# Altium PCB PCB.PcbDoc
Units mil, origin at the board's own origin, x right, y up, seen from the top; angles counter-clockwise.
Board outline 6000 x 4000 mil, 2 copper layers (Top Layer, Bottom Layer); 53 components, 40 nets, 177 pads, 0 vias.
Unrouted connection lines stored in the file: 111.
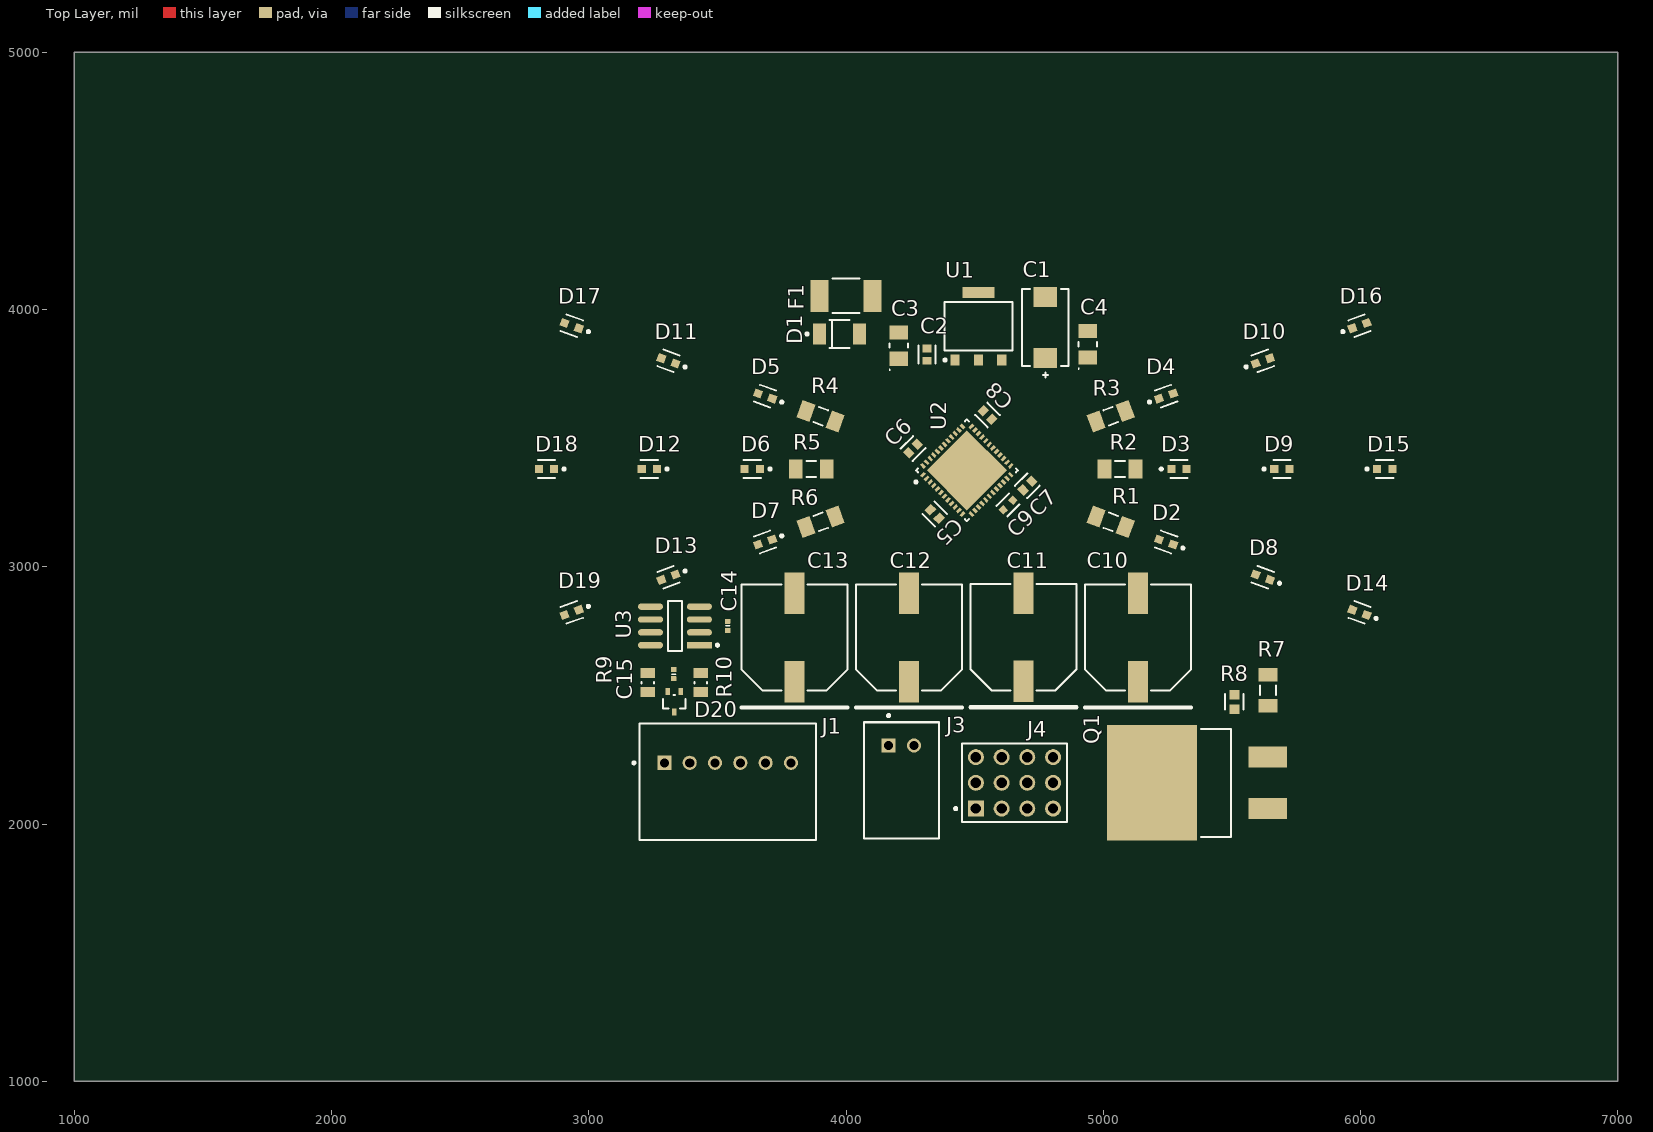
[diagram p0: Top Layer view]
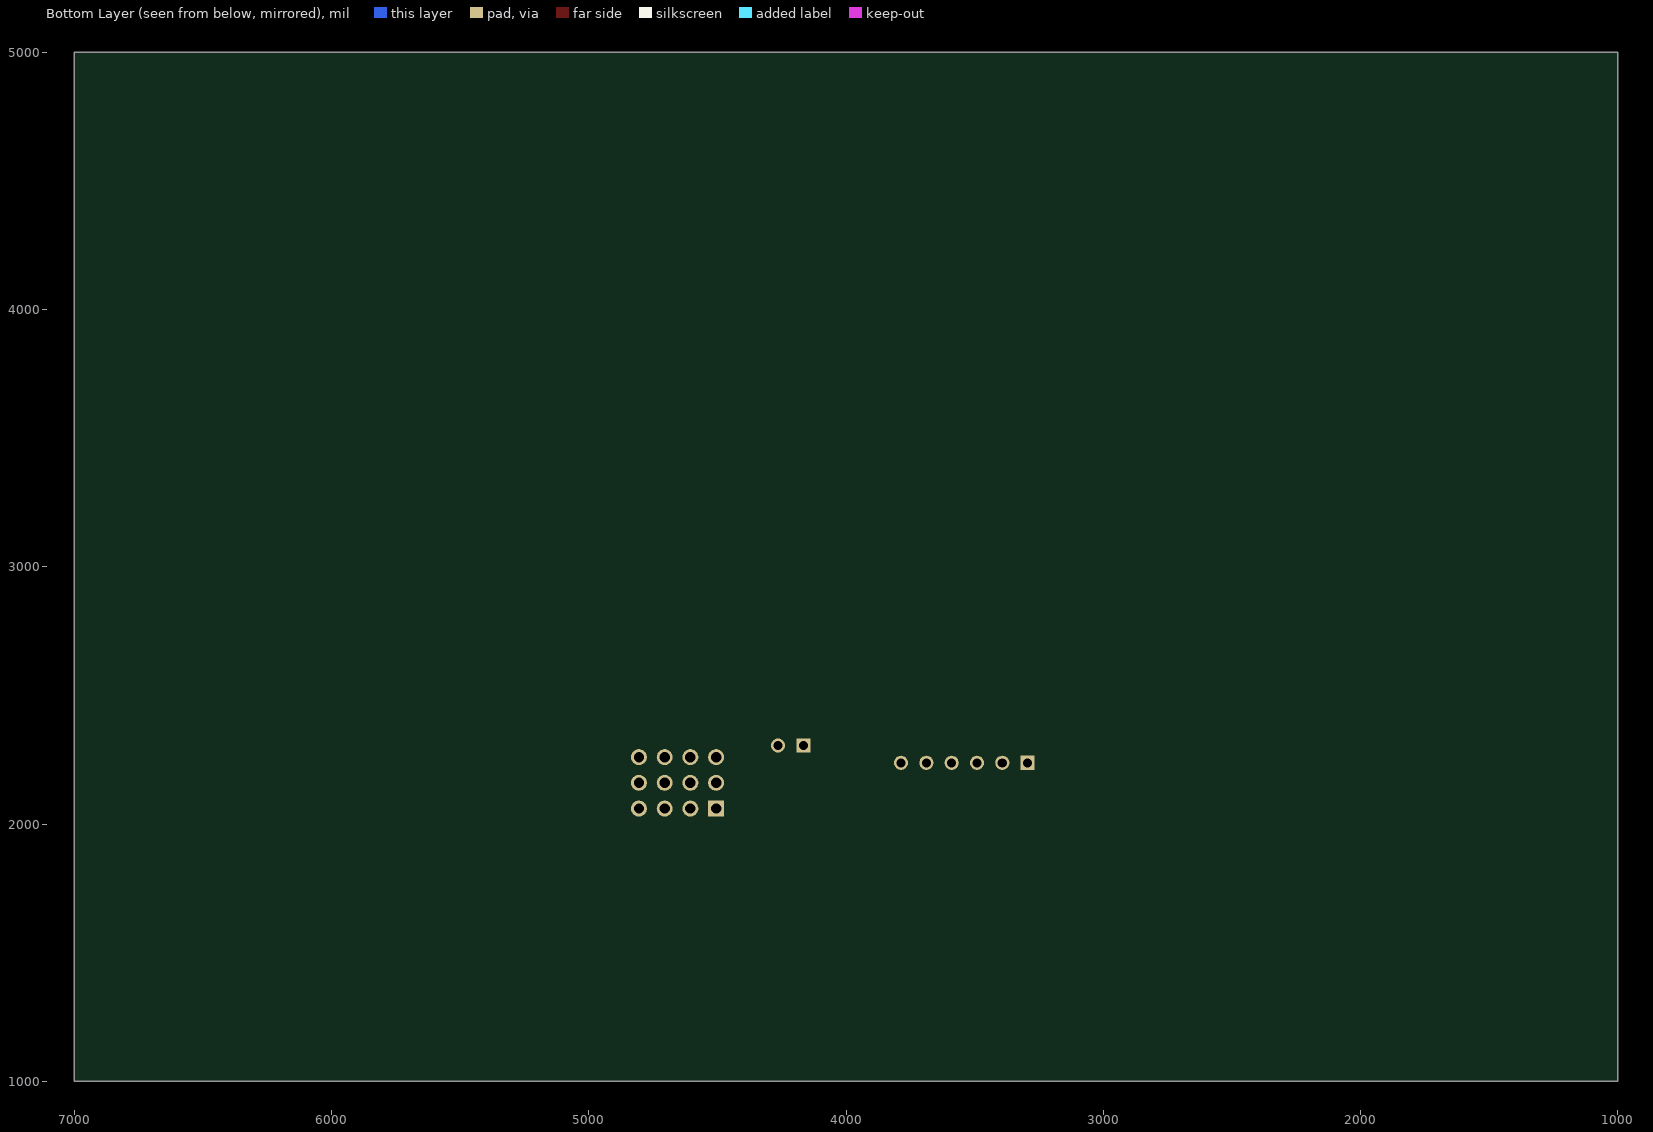
[diagram p1: Bottom Layer view, seen from below]

## Layer stack, top to bottom
Top Solder: solder mask 0.4, Solder Resist, Dk 3.5
Top Layer: signal copper 1.4
Dielectric 1: dielectric 12.6, FR-4, Dk 4.8
Bottom Layer: signal copper 1.4
Bottom Solder: solder mask 0.4, Solder Resist, Dk 3.5

## Board outline
1000,1000 7000,1000 7000,5000 1000,5000

## Design rules (kind name [scope] priority, off if disabled: settings)
Clearance [All] p1: gap=10 ignorepadtopadclearanceinfootprint=TRUE except(0: Arc-Hole Track-Hole SMDPad-Hole THPad-Hole Via-Hole Fill-Hole Poly-Hole Region-Hole Text-Hole)
PolygonConnect [All] p1: connectstyle=Relief reliefconductorwidth=10 reliefentries=4 polygonreliefangle="90 Angle" airgapwidth=10
RoutingVias [All] p1: holewidth=10 width=20 viastyle="Through Hole" minholewidth=10 minwidth=20 maxholewidth=28 maxwidth=50
SolderMaskExpansion [All] p1: expansion=4 istentingtop=FALSE
Width [All] p1: maxlimit=50 minlimit=8 preferedwidth=8
30 further rules are at their usual default settings.

## Classes and differential pairs
component class "Voltage Regulators": C1 C2 C3 C4 U1
component class STM32: C5 C6 C7 C8 C9 C10 C11 C12 C13 J4 U2
component class LEDs: D2 D3 D4 D5 D6 D7 D8 D9 D10 D11 D12 D13 D14 D15 D16 D17 D18 D19 Q1 R1 R2 R3 R4 R5 R6 R7 R8
component class "CAN Transceiver": C14 C15 D20 R9 R10 U3
component class Brakelight: D1 F1 J1 J2 J3

## Components (designator, comment, footprint, x,y, rotation, side; value= is the part's Value field where it differs from the comment)
C1 "100µF" FP-T491X107K025AT-MFG 4775,3930 r270 top
C2 "0.1u" FP-C0603C-CF-MFG 4315,3825 r90 top value="0.10 μF"
C3 "TAJA106K016RNJ" CAPMP3217X18-T_V 4205,3860 r90 top value=10µF
C4 "TAJA106K016RNJ" CAPMP3217X18-T_V 4940,3865 r90 top value=10µF
C5 "0.1u" FP-C0603C-CF-MFG 4345,3205 r135 top value="0.10 μF"
C6 "0.1u" FP-C0603C-CF-MFG 4260,3460 r45 top value="0.10 μF"
C7 "0.1u" FP-C0603C-CF-MFG 4705,3315 r225 top value="0.10 μF"
C8 "0.1u" FP-C0603C-CF-MFG 4550,3590 r315 top value="0.10 μF"
C9 "2.2uF" FP-GRM188-0_1-e0_2_0_5-MFG 4630,3240 r45 top
C10 "470u" PNSC-FP-V-G_V 5135.15,2725 r90 top
C11 "470u" PNSC-FP-V-G_V 4690.1,2725.54 r90 top
C12 "470u" PNSC-FP-V-G_V 4245.05,2725 r90 top
C13 "470u" PNSC-FP-V-G_V 3800,2725 r90 top
C14 "100nF" CAPC0402(1005)60_L 3540,2770 r270 top
C15 "100nF" CAPC0402(1005)60_L 3330,2582.74 r90 top
D1 "SMAJ15A" FP-SMA-MFG 3975,3905 r0 top
D2 "LTST-C190EKT" FP-LTST-C190EKT-MFG 5244.5,3096.28 r160 top
D3 "LTST-C190EKT" FP-LTST-C190EKT-MFG 5294.53,3380 r0 top
D4 "LTST-C190EKT" FP-LTST-C190EKT-MFG 5244.5,3663.72 r20 top
D5 "LTST-C190EKT" FP-LTST-C190EKT-MFG 3685.5,3663.72 r160 top
D6 "LTST-C190EKT" FP-LTST-C190EKT-MFG 3635.47,3380 r180 top
D7 "LTST-C190EKT" FP-LTST-C190EKT-MFG 3685.5,3096.28 r200 top
D8 "LTST-C190EKT" FP-LTST-C190EKT-MFG 5620.38,2959.48 r160 top
D9 "LTST-C190EKT" FP-LTST-C190EKT-MFG 5694.53,3380 r0 top
D10 "LTST-C190EKT" FP-LTST-C190EKT-MFG 5620.38,3800.52 r20 top
D11 "LTST-C190EKT" FP-LTST-C190EKT-MFG 3309.62,3800.52 r160 top
D12 "LTST-C190EKT" FP-LTST-C190EKT-MFG 3235.47,3380 r180 top
D13 "LTST-C190EKT" FP-LTST-C190EKT-MFG 3309.62,2959.48 r200 top
D14 "LTST-C190EKT" FP-LTST-C190EKT-MFG 5996.26,2822.67 r160 top
D15 "LTST-C190EKT" FP-LTST-C190EKT-MFG 6094.53,3380 r0 top
D16 "LTST-C190EKT" FP-LTST-C190EKT-MFG 5996.26,3937.33 r20 top
D17 "LTST-C190EKT" FP-LTST-C190EKT-MFG 2933.74,3937.33 r160 top
D18 "LTST-C190EKT" FP-LTST-C190EKT-MFG 2835.47,3380 r180 top
D19 "LTST-C190EKT" FP-LTST-C190EKT-MFG 2933.74,2822.67 r200 top
D20 "ESDCAN02-2BWY" FP-SOT323-3L-MFG 3332.31,2475.29 r270 top value=3pF
F1 "1812L150/24MR" FP-1812L-MFG 4000,4052.81 r180 top value=0.04-0.12Ω
J1 "S6B-XH-A-1(LF)(SN)" FP-S6B-XH-A-1_LF_SN-MFG 3540,2165 r180 top
J3 "S2B-XH-A(LF)(SN)" JST-S2B-XH-A(LF)(SN)_V 4215,2305 r0 top
J4 "TSW-104-07-G-T" FP-TSW-104-07-G-T-MFG 4655,2160 r0 top
Q1 "IRLZ44N" FP-PG-TO263-3-MFG 5365,2160 r90 top
R1 "300" FP-CRCW1206-e3-IPC_A 5028.82,3174.79 r159.99 top
R2 "300" FP-CRCW1206-e3-IPC_A 5065,3380 r180 top
R3 "300" FP-CRCW1206-e3-IPC_A 5028.82,3585.21 r200 top
R4 "300" FP-CRCW1206-e3-IPC_A 3901.18,3585.21 r340 top
R5 "300" FP-CRCW1206-e3-IPC_A 3865,3380 r0 top
R6 "300" FP-CRCW1206-e3-IPC_A 3901.18,3174.79 r20 top
R7 "300" FP-CRCW1206-e3-IPC_A 5640,2520 r270 top
R8 "10K" FP-CRCW0603-e3-IPC_B 5510,2475 r270 top
R9 "59" FP-CRCW0805-e3-IPC_B 3229.62,2550 r270 top
R10 "59" FP-CRCW0805-e3-IPC_B 3435,2550 r90 top
U1 "LT1129IST-3.3#PBF" LT-ST-3-SOT-223_L 4515,3935 r90 top
U2 "STM32F412CGU6" FP-UFQFPN48-A0B9-MFG 4470,3375 r45 top
U3 "SN65HVD230DR" FP-D0008A-IPC_A 3335,2770 r180 top

## Footprints (in the part's own frame and the unit in brackets; to place one, negate y for a bottom-side part, rotate by r counter-clockwise, add the part's x,y. Pads: shape width x height; smd on the part's side, far side on the other; paste and mask are expansions set on the pad)
CAPC0402(1005)60_L [mm] "Chip Capacitor, Body 1.0x0.5mm, Height 0.6mm, IPC High Density"
  rrect25% 0.5x0.55 smd: 1(-0.45,0) 2(0.45,0)
  silkscreen extent 0,-0.2 0,0.2, body extent -0.5,-0.25 0.5,0.25, height 0.6
CAPMP3217X18-T_V [mm] "Molded Capacitor, 2-Leads, Body 3.40x1.8mm"
  rect 1.4x1.8 smd: 1(-1.3,0) 2(1.3,0)
  silkscreen extent -2.45,-0.9 0.2,0.95, body extent -1.92,-0.9 1.92,0.9, height 1.8
FP-1812L-MFG [mm]
  rect 1.78x3.15 smd paste+0 mask+0: 1(-2.615,0) 2(2.615,0)
  silkscreen extent -1.35,-1.71 1.35,1.71, body extent -3.6,-1.81 3.6,1.81, height 0.25
FP-C0603C-CF-MFG [mm]
  rect 0.75x0.9 smd paste+0 mask+0: 1(-0.6,0) 2(0.6,0)
  silkscreen extent -0.87,-0.85 0.88,0.85, body extent -1.2,-0.6 1.2,0.6, height 0.25
FP-CRCW0603-e3-IPC_B [mil]
  rect 36.81x37.88 smd paste+0 mask+0: 1(-28.17,0) 2(28.17,0)
  silkscreen extent -30,-37 30,35, body extent -56,-29 56,29, height 10
FP-CRCW0805-e3-IPC_B [mil]
  rect 39.63x55.44 smd paste+0 mask+0: 1(-37.44,0) 2(37.44,0)
  silkscreen extent -3,-25 3,25, body extent -39,-25 39,25, height 20
FP-CRCW1206-e3-IPC_A [mil]
  rect 53.39x73.16 smd paste+0 mask+0: 1(-60.08,0) 2(60.08,0)
  silkscreen extent -19,-31 19,31, body extent -106,-56 106,56, height 10
FP-D0008A-IPC_A [mil]
  rect 97.21x24.49 smd paste+0 mask+0: 1(-95.02,75)
  rrect100% 97.21x24.49 smd paste+0 mask+0: 2(-95.02,25) 3(-95.02,-25) 4(-95.02,-75) 5(95.02,-75) 6(95.02,-25) 7(95.02,25) 8(95.02,75)
  silkscreen extent -170,-97 27,97, body extent -163,-116 163,116, height 10
FP-GRM188-0_1-e0_2_0_5-MFG [mm]
  rect 0.65x0.7 smd paste+0 mask+0: 1(-0.675,0) 2(0.675,0)
  silkscreen extent -0.85,-0.75 0.85,0.75, body extent -1.1,-0.55 1.1,0.55, height 0.25
FP-LTST-C190EKT-MFG [mm]
  rect 0.8x0.8 smd paste+0 mask+0: 1(-0.75,0) 2(0.75,0)
  silkscreen extent -1.87,-0.87 0.85,0.88, body extent -1.25,-0.55 1.25,0.55, height 0.25
FP-PG-TO263-3-MFG [mm]
  rect 2.08x3.81 smd paste+0 mask+0: 1(-2.54,-6.985) 3(2.54,-6.985)
  rect 11.43x8.89 smd paste+0 mask+0: 4(0,4.445)
  silkscreen extent -5.34,-3.36 5.34,-0.38, body extent -5.81,-8.99 5.81,8.99, height 0.25
FP-S6B-XH-A-1_LF_SN-MFG [mm]
  rect 1.4x1.4 hole 0.9 paste-1000 mask+0: 1(6.25,-1.85)
  round 1.4 hole 0.9 paste-1000 mask+0: 2(3.75,-1.85) 3(1.25,-1.85) 4(-1.25,-1.85) 5(-3.75,-1.85) 6(-6.25,-1.85)
  silkscreen extent -8.7,-5.75 9.37,5.75, body extent -8.8,-5.85 8.8,5.85, height 0.25
FP-SMA-MFG [mm]
  rect 1.27x2.1 smd paste+0 mask+0: 1(-1.985,0) 2(1.985,0)
  silkscreen extent -3.32,-1.4 0.97,1.4, body extent -2.72,-1.5 2.72,1.5, height 0.25
FP-SOT323-3L-MFG [mm]
  rect 0.7x0.42 smd paste+0 mask+0: 1(-1,0.65) 2(-1,-0.65) 3(1,0)
  silkscreen extent -0.67,-1.1 0.67,1.1, body extent -1.45,-1.2 1.45,1.2, height 0.25
FP-T491X107K025AT-MFG [mm]
  rect 1.99x2.33 smd paste+0 mask+0: 1(-3.01,0) 2(3.01,0)
  silkscreen extent -3.8,-2.3 4.92,2.3, body extent -4.11,-2.4 4.11,2.4, height 0.25
FP-TSW-104-07-G-T-MFG [mm]
  rect 1.57x1.57 hole 1.02 paste-1000 mask+0: 1(-3.81,-2.54)
  round 1.57 hole 1.02 paste-1000 mask+0: 2(-3.81,0) 3(-3.81,2.54) 4(-1.27,-2.54) 5(-1.27,0) 6(-1.27,2.54) 7(1.27,-2.54) 8(1.27,0) 9(1.27,2.54) 10(3.81,-2.54) 11(3.81,0) 12(3.81,2.54)
  silkscreen extent -5.93,-3.88 5.21,3.88, body extent -5.31,-3.98 5.31,3.98, height 0.25
FP-UFQFPN48-A0B9-MFG [mm]
  rect 0.55x0.3 smd paste+0 mask+0: 1(-3.375,2.75) 2(-3.375,2.25) 3(-3.375,1.75) 4(-3.375,1.25) 5(-3.375,0.75) 6(-3.375,0.25) 7(-3.375,-0.25) 8(-3.375,-0.75) 9(-3.375,-1.25) 10(-3.375,-1.75) 11(-3.375,-2.25) 12(-3.375,-2.75) 25(3.375,-2.75) 26(3.375,-2.25) 27(3.375,-1.75) 28(3.375,-1.25) 29(3.375,-0.75) 30(3.375,-0.25) 31(3.375,0.25) 32(3.375,0.75) 33(3.375,1.25) 34(3.375,1.75) 35(3.375,2.25) 36(3.375,2.75)
  rect 0.3x0.55 smd paste+0 mask+0: 13(-2.75,-3.375) 14(-2.25,-3.375) 15(-1.75,-3.375) 16(-1.25,-3.375) 17(-0.75,-3.375) 18(-0.25,-3.375) 19(0.25,-3.375) 20(0.75,-3.375) 21(1.25,-3.375) 22(1.75,-3.375) 23(2.25,-3.375) 24(2.75,-3.375) 37(2.75,3.375) 38(2.25,3.375) 39(1.75,3.375) 40(1.25,3.375) 41(0.75,3.375) 42(0.25,3.375) 43(-0.25,3.375) 44(-0.75,3.375) 45(-1.25,3.375) 46(-1.75,3.375) 47(-2.25,3.375) 48(-2.75,3.375)
  rect 5.6x5.6 smd paste+0 mask+0: 49(0,0)
  silkscreen extent -4.5,-3.55 3.55,3.55, body extent -3.75,-3.75 3.75,3.75, height 0.25
JST-S2B-XH-A(LF)(SN)_V [mm] "Header, 2-Leads, Body 7.4x11.5mm, Pitch 2.5mm"
  rect 1.4x1.4 hole 0.9: 1(-1.25,0)
  round 1.4 hole 0.9: 2(1.25,0)
  silkscreen extent -3.7,-9.2 3.7,3.08, body extent -3.7,-9.2 3.7,2.3, height 6.1
LT-ST-3-SOT-223_L [mm] "SOT223, 4-Leads, Body 6.505x3.505mm, Pitch 2.3mm, IPC High Density"
  rect 1.1x0.9 smd: 1(-3.35,2.3) 2(-3.35,0) 3(-3.35,-2.3)
  rect 1.1x3.15 smd: 4(3.35,0)
  silkscreen extent -3.47,-3.35 2.4,3.42, body extent -1.86,-3.35 1.86,3.35, height 1.8
PNSC-FP-V-G_V [mm] "CAPAE, 2-Leads, Body 10.50x10.50mm"
  rect 4.1x2 smd: 1(-4.35,0) 2(4.35,0)
  silkscreen extent -6.9,-5.25 5.25,5.25, body extent -6,-5.25 6,5.25, height 10.5

## Part data
C1: library part CMP-2000-07204-2, "CAP TANT 100UF 10% 25V 2917", Capacitance=100uF, Case Code (Imperial)=2917, Case Code (Metric)=7343, Dielectric Material=Tantalum, ESR (Equivalent Series Resistance)=300mR, Leakage Current=25uA, Max Operating Temperature=125°C, Min Operating Temperature=-55°C, Package Quantity=1, Ripple Current=742mA, Tolerance=10%, Voltage=25V, Case/Package=2917, Construction=Flat, Depth=4.3mm, Dissipation Factor=8%, Failure Rate=0.001%, Features="General Purpose", Height=4mm, Height - Seated (Max)=0.169inch, Lead Free="Lead Free", Length=7.3mm, Life (Hours)=2000Hour, Mount="Surface Mount", Number of Pins=2, Packaging="Tape and Reel", Polarity=Polar, Radiation Hardening=No, REACH SVHC="No SVHC", RoHS Compliant=No, Series=T491, Termination=SMD/SMT, Voltage Rating=25V, Voltage Rating (DC)=25V, Width=4.3mm
C2 C5 C6 C7 C8: library part CMP-2006-03061-2, "CAP CER 0.1UF 50V X7R 0603", Capacitance="0.10 μF", Manufacturer=KEMET, Manufacturer Part Number=C0603C104K5RACTU, Package=C0603C-CF, Temperature="-55°C to +125°C", Temperature Characteristic=X7R, Temperature Coefficient=30ppm/°C, Temperature Range High=+125°C, Temperature Range Low=-55°C, Tolerance=0.1, Voltage Rating="50 V", Automotive=Yes, Automotive Grade="Grade 1", Category=Cap, ComponentLink2Description=Datasheet, ComponentLink2URL=https://api.kemet.com/component-edge/download/datasheet/C0603C100J5GACAUTO.pdf, Device Class L1="Passive Components", Device Class L2=Capacitors, Device Class L3="Ceramic Capacitors", Digikey Description="CAP CER 0.1UF 50V X7R 0603", Height=0.87mm, Lead Free=Yes, Material=Ceramic, Octopart=https://octopart.com/c0603c104k5ractu-kemet-139244, RoHS=TRUE
C3 C4: library part CMP-001-00041-6, "Standard Tantalum, 10 uF, +/- 10%, 16 V, -55 to 125 degC, 1206 (3216 Metric), RoHS, Tape and Reel", Capacitor Type=Tantalum, Case/Package=1206, Manufacturer=AVX, Max Operating Temperature=125°C, Min Operating Temperature=-55°C, Package Description="2-Pin Surface Mount Device, Body 3.2 x 1.65 mm", Package Quantity=1, Package Reference=CAPMP3217X18-T, Tolerance=10%, Voltage Rating=16V, Datasheet URL=http://datasheets.avx.com/TAJ.pdf, Datasheet Version=Feb-16, ESR=3Ohm, Manufacturer URL=http://www.avx.com/, Mounting Technology=SM, Package URL=http://www.avx.com/download/software/literature/AVX-Footprint-Library.pdf, Packaging=TapeandReel, Pins=2, RoHS Compliant=True
C9: library part CMP-2006-02836-2, "Chip Multilayer Ceramic Capacitors for General Purpose, 0603, 2.2uF, X7R, 15%, 10%, 10V", Case Code (Imperial)=0603, Case Code (Metric)=1608, Dielectric=X7R, Max Operating Temperature=125°C, Min Operating Temperature=-55°C, Package Quantity=1, Tolerance=10%, Voltage=10V, Capacitance=2.2uF, Case/Package=0603, Depth=0.8mm, Height=0.8mm, Lead Free="Lead Free", Length=1.6mm, Material=Ceramic, Mount="Surface Mount", Number of Pins=2, Packaging="Cut Tape", REACH SVHC="No SVHC", Termination=SMD/SMT, Thickness=0.035inch, Voltage Rating=10V, Voltage Rating (DC)=10V, Weight=7.1E-05oz, Width=0.031inch
C10 C11 C12 C13: library part CMP-2000-06214-1, "Aluminum Electrolytic Capacitor, 470 uF, +/- 20%, 25 V, 2-Pin SMD (Size Code G), -55 to 105 degC, RoHS, Tape and Reel", Capacitance=470µF, Case Size/Dimension=Ø10x10.2mm, ESR (Equivalent Series Resistance)=0.06O, Lifetime@Temperature=2000Hrs@105°C, Manufacturer=Panasonic, Operating Temp Range=-55to+105°C, Operating Temp-Max=105°C, Package Description="2-Pin Electrolytic Aluminum Capacitor, Body 10.3 x 10.3 mm", Package Reference=FP-V-G, Rated Voltage=25V, Ripple Current=1190mA, Datasheet URL=http://industrial.panasonic.com/cdbs/www-data/pdf/RDE0000/ABA0000C1184.pdf, Datasheet Version=03/2016, Manufacturer URL=http://www.panasonic.com/, Mounting Technology=SurfaceMount, Package URL=http://industrial.panasonic.com/cdbs/www-data/pdf/RDE0000/DME0000COL48.pdf, Series=FP, Type=Can
C14 C15: library part CMP-001-00061-2, "Chip Capacitor, 100nF +/-20%, 10V, 0402, Thickness 0.6 mm", Case/Package=0402, Max Operating Temperature=85°C, Min Operating Temperature=-55°C, Tolerance=20%, Voltage Rating=10V, Mounting Technology=SMT, Pins=2
D1: library part CMP-07401-000026-1, "TVS DIODE 15V 24.4V SMA", Breakdown Voltage=16.7V, Clamping Voltage=24.4V, Manufacturer="Bourns Inc.", Max Junction Temp=+150°C, Package=SMA, Peak Pulse Current=16.4A, Peak Pulse Power=400W, Reverse Standoff Voltage=15V, Temperature="-55°C to +150°C", Temperature Range Low=-55°C, Automotive=No, Category=Diode, ComponentLink2Description=Datasheet, ComponentLink2URL=https://www.bourns.com/docs/Product-Datasheets/SMAJ.pdf, Device Class L1="Circuit Protection", Device Class L2="TVS Diodes", Device Class L3=unset, Digikey Description="TVS DIODE 15V 24.4V SMA", Direction=Unidirectional, Height=2.29mm, Lead Free=Yes, Manufacturer Part Number=SMAJ15A, Mouser Description="Bourns Smaj15a / Diode Tvs 15v 400w Uni 5% Smd Bourns", Number Of Channels=1, Octopart=https://octopart.com/smaj15a-bourns-12809353, RoHS=TRUE, Temperature Range High=+150°C
D2 D3 D4 D5 D6 D7 D8 D9 D10 D11 D12 D13 D14 D15 D16 D17 D18 D19: library part CMP-22017-000021-1, "LED RED CLEAR CHIP SMD", Case Code (Imperial)=0603, Case Code (Metric)=1608, Color=Red, Forward Current=30mA, Forward Voltage=2V, Lens Color=Colorless, Max Operating Temperature=85°C, Max Power Dissipation=100mW, Min Operating Temperature=-55°C, Package Quantity=1, Reverse Voltage=5V, Test Current=10mA, Case/Package=0603, Depth=0.8mm, Dominant Wavelength=621nm, Height=0.8mm, Illumination Color=Red, Lead Free="Lead Free", Length=1.6mm, Lens Style=Clear, Lens Transparency=Clear, Luminous Intensity=2mcd, Mount="Surface Mount", Number of Elements=1, Number of LEDs=1, Number of Pins=2, Packaging="Tape and Reel", Power Dissipation=100mW, Power Rating=100mW, Radiation Hardening=No, Viewing Angle=130°, Wavelength=630nm, Width=0.8mm
D20: library part CMP-12225-000055-1, "TVS DIODE 26.5V 44V SOT323-3", Breakdown Voltage=28.5V, Capacitance=3pF, Clamping Voltage=44V, Manufacturer=STMicroelectronics, Max Junction Temp=+175°C, Package=SOT323-3L, Peak Pulse Current=3A, Peak Pulse Power=170W, Reverse Standoff Voltage=26.5V, Temperature="-55°C to +175°C", Temperature Range Low=-55°C, Automotive=Yes, Automotive Grade="Grade 0", Category=Diode, ComponentLink2Description=Datasheet, ComponentLink2URL=https://www.st.com/resource/en/datasheet/esdcan02-2bwy.pdf, Device Class L1="Circuit Protection", Device Class L2="TVS Diodes", Device Class L3=unset, Digikey Description="TVS DIODE 26.5V 44V SOT323-3", Direction=Bidirectional, Height=1.1mm, Ipc Land Pattern Name=SOT65P210X95-3, Lead Free=Yes, Manufacturer Part Number=ESDCAN02-2BWY, Mouser Description="TVS Diodes / ESD Suppressors Automotive dual-line Transil, Transient voltage suppressor (TVS) for CAN bus", Number Of Channels=2, Octopart=https://octopart.com/esdcan02-2bwy-stmicroelectronics-58631133, RoHS=TRUE, Standoff Height=0mm, Temperature Range High=+175°C
F1: library part CMP-08606-000018-1, "PTC RESET FUSE 24V 1.5A 1812", Ambient Temperature Range High=+85°C, Ambient Temperature Range Low=-40°C, Current Rating=20A, Hold Current=1.5A, Manufacturer="Littelfuse Inc", Package=1812L, Resistance=0.04-0.12Ω, Temperature="-40°C to +85°C", Trip Current=3A, Voltage Rating=24V, Automotive=No, Category=Fuse, ComponentLink2Description=Datasheet, ComponentLink2URL=https://www.littelfuse.com/~/media/electronics/datasheets/resettable_ptcs/littelfuse_ptc_1812l_datasheet.pdf.pdf, Device Class L1="Circuit Protection", Device Class L2="PTC Resettable Fuses", Device Class L3=unset, Digikey Description="PTC RESET FUSE 24V 1.5A 1812", Height=1.8mm, Ipc Land Pattern Name=CAPC455324X130, Lead Free=Yes, Manufacturer Part Number=1812L150/24MR, Mouser Description="Resettable Fuses - PPTC 24V 1.5A-HD 40A MAX", Octopart=https://octopart.com/1812l150%2F24mr-littelfuse-7130198, RoHS=TRUE, Temperature Range High=+85°C, Temperature Range Low=-40°C, Trip Time=1.5s
J1: library part CMP-17439-000023-1, "CONN HEADER R/A P6OS 2.5MM", Color=Natural, Current Rating=3A, Insulation Resistance=1GR, Max Operating Temperature=85°C, Min Operating Temperature=-25°C, Voltage Rating=250V, Contact Material=Brass, Contact Plating=Tin, Gender=Male, Lead Free="Lead Free", Material=Polyamide, Mount="Through Hole", Number of Positions=6, Number of Rows=1, Pitch=2.5mm, Termination=Crimp
J3: library part CMP-1755-00005-1, "Male Header, Pitch 2.5 mm, 1 x 2 Position, Height 6.1 mm, Tail Length 3.4 mm, -25 to 85 degC, RoHS, Bulk", Capacitance="1 nF", Case\Package=Radial, Max Operating Temperature="125 degC", Min Operating Temperature="-55 degC", Package Quantity=500, Tolerance=10%, Type (Capacitors)=X7R, Voltage Rating="100 V", ComponentLink1Description="Manufacturer URL", ComponentLink1URL=http://www.jst.com/home2.html, ComponentLink2Description=Datasheet, ComponentLink2URL=http://www.jst-mfg.com/product/pdf/eng/eXH.pdf, DatasheetVersion=May-16, Height="2.54 mm", Lead Pitch="2.54 mm", Length="5.33 mm", Mount="Through Hole", PackageDescription="Male Header, Pitch 2.5 mm, 1 x 2 Position, Height 6.1 mm, Tail Length 3.4 mm", PackageReference=S2B-XH-A(LF)(SN), Packaging=Bulk, Pins=2, Radiation Hardening=No, REACH SVHC="No SVHC", RoHSCompliant=true, Voltage Rating (DC)="100 V", Width="3.81 mm"
J4: library part CMP-1024-00347-2, "CONN HEADER VERT 12POS 2.54MM", Manufacturer=Samtec, Temperature="-55°C to +125°C", Temperature Range High=+125°C, Temperature Range Low=-55°C, Automotive=No, Category=Conn, ComponentLink2Description=Datasheet, ComponentLink2URL=http://suddendocs.samtec.com/prints/tsw-xxx-xx-xxx-x-xx-xxx-mkt.pdf, Conn Gender=Male, Conn Orientation=Straight, Contact Material=Gold,Nickel, Device Class L1=Connectors, Device Class L2="Headers and Wire Housings", Device Class L3=unset, Digikey Description="CONN HEADER VERT 12POS 2.54MM", Footprint Url=http://suddendocs.samtec.com/prints/tsw-xxx-xx-x-x-xx-xxx-footprint.pdf, Height=8.64mm, Lead Free=Yes, Manufacturer Part Number=TSW-104-07-G-T, Number Of Contacts=12, Number of Rows=3, Octopart=https://octopart.com/tsw-104-07-g-t-samtec-8296723, Package=TSW-104-07-G-T, Pitch=2.54mm, RoHS=TRUE
Q1: library part CMP-32901-000495-1, "MOSFET N-CH 55V 47A D2PAK", Case/Package=D2PAK, Continuous Drain Current (ID)=47A, Drain to Source Breakdown Voltage=55V, Drain to Source Resistance=35mR, Gate to Source Voltage (Vgs)=16V, Input Capacitance=1.7nF, Max Operating Temperature=175°C, Max Power Dissipation=3.8W, Min Operating Temperature=-55°C, Power Dissipation=110W, Threshold Voltage=2V, Drain to Source Voltage (Vdss)=55V, Element Configuration=Single, Halogen Free="Halogen Free", Height=0.19inch, Lead Free="Contains Lead", Length=0.42inch, Max Dual Supply Voltage=55V, Mount="Surface Mount", Number of Pins=3, Packaging="Tape and Reel", Rds On Max=22mR, REACH SVHC="No SVHC", RoHS Compliant=Yes, Turn-Off Delay Time=26ns, Turn-On Delay Time=11ns, Width=0.38inch
R1 R2 R3 R4 R5 R6 R7: library part CMP-1014-00449-3, "RES Thick Film, 300Ω, 1%, 0.25W, 100ppm/°C, 1206", Case Code (Imperial)=1206, Case Code (Metric)=3216, Max Operating Temperature=155°C, Max Power Dissipation=250mW, Min Operating Temperature=-55°C, Package Quantity=10, Resistance=300R, Temperature Coefficient=100ppm/°C, Tolerance=1%, Voltage Rating=200V, Case/Package=1206, Composition="Thick Film", Contact Plating=Tin, Depth=1.6mm, Features="Automotive AEC-Q200", Height=0.55mm, Lead Free="Lead Free", Length=3.2mm, Military Standard=Not, Mount="Surface Mount", Number of Terminations=2, Packaging="Tape and Reel", Power Rating=250mW, Radiation Hardening=No, Termination=SMD/SMT, Voltage Rating (DC)=200V, Weight=0.000353oz, Width=0.063inch, Working Voltage=200V
R8: library part CMP-2000-03836-2, "RES Thick Film, 10kΩ, 1%, 0.1W, 100ppm/°C, 0603", Case Code (Imperial)=0603, Case Code (Metric)=1608, Max Operating Temperature=155°C, Max Power Dissipation=100mW, Min Operating Temperature=-55°C, Package Quantity=10000, Resistance=10kR, Temperature Coefficient=100ppm/°C, Tolerance=1%, Voltage Rating=75V, Case/Package=0603, Composition="Thick Film", Contact Plating=Tin, Depth=0.85mm, Features="Automotive AEC-Q200", Height=0.02inch, Lead Free="Lead Free", Length=1.55mm, Military Standard=Not, Number of Pins=2, Number of Terminations=2, Packaging="Tape and Reel", Power Rating=100mW, Radiation Hardening=No, Voltage Rating (DC)=75V, Weight=7.1E-05oz, Width=0.033inch
R9 R10: library part CMP-02407-002414-1, "RES Thick Film, 59Ω, 1%, 0.125W, 100ppm/°C, 0805", Case Code (Imperial)=0805, Case Code (Metric)=2012, Max Operating Temperature=155°C, Max Power Dissipation=125mW, Min Operating Temperature=-55°C, Package Quantity=10, Resistance=59R, Temperature Coefficient=100ppm/°C, Tolerance=1%, Voltage Rating=150V, Case/Package=0805, Composition="Thick Film", Contact Plating=Tin, Depth=1.25mm, Features="Automotive AEC-Q200", Height=0.02inch, Lead Free="Lead Free", Length=2mm, Military Standard=Not, Mount="Surface Mount", Number of Pins=2, Number of Terminations=2, Packaging="Tape and Reel", Power Rating=125mW, Radiation Hardening=No, Termination=SMD/SMT, Voltage Rating (DC)=150V, Weight=0.000194oz, Width=1.25mm
U1: library part CMP-0476-01834-1, "Micropower Low Dropout Regulator with Shutdown, 4.15 to 30 V Vin, 3.3 V Vout, 3-pin SOT223 (ST-3), -40 to 125 degC, Pb-Free", Dropout Voltage(V)=0.45, Manufacturer="Linear Technology", Output Voltage="3.3 V", Shutdown Current(uA)=16, ComponentLink1Description="Manufacturer URL", ComponentLink1URL=http://www.linear.com/, ComponentLink2Description=Datasheet, ComponentLink2URL=http://cds.linear.com/docs/en/datasheet/112935ff.pdf, ComponentLink3Description="Package Specification", ComponentLink3URL=http://cds.linear.com/docs/en/packaging/SOT_3_05-08-1630.pdf, DatasheetVersion="Rev. F", Discrete Pass Element=no, Iout(mA)=700, Isupply(mA)=0.05, Mounting Technology="Surface Mount", Number of Outputs=1, PackageDescription="3-Pin Plastic SOT-223, 3.505 x 6.505 mm Body, Pitch 2.3 mm", PackageReference=ST-3, PackageVersion=Jun-10, PartNumber=LT1129IST-3.3#PBF, PSRR(dB)=64, RoHS=TRUE, Vin Max(V)=30, Vin Min(V)=4.15
U2: library part CMP-12105-000086-1, "IC MCU 32BIT 1MB FLASH 48UFQFPN", Frequency=100MHz, Max Operating Temperature=85°C, Min Operating Temperature=-40°C, Core Architecture=ARM, Interface=I2C, Memory Size=1MB, Memory Type=FLASH, Number of I/Os=36, Oscillator Type=Internal, Peripherals="Brown-out Detect/Reset"
U3: library part CMP-0315-00015-3, "IC TRANSCEIVER HALF 1/1 8SOIC", Case/Package=D, Max Operating Temperature=85°C, Max Supply Current=17mA, Max Supply Voltage=3.6V, Min Operating Temperature=-40°C, Min Supply Voltage=3V, Operating Supply Voltage=3.3V, Package Quantity=1, Contact Plating=Gold, Data Rate=1Mbps, Lead Free="Lead Free", Nominal Supply Current=17mA, Number of Drivers=1, Number of I/Os=2, Number of Pins=8, Number of Receive Buffers=1, Number of Receivers=1, Number of Transceivers=1, Number of Transmit Buffers=1, Packaging="Tape and Reel", Radiation Hardening=No, REACH SVHC="No SVHC", Termination=SMD/SMT, Weight=0.002561oz

## Nets (pads, with @x,y where several pads share a name; then routed paths per layer and width w, separated by ;. In a path a pad name is that pad's centre, name@x,y a point inside that pad or via, vN(x,y) a via of type N, cw(c..) or ccw(c..) an arc to the next point about the centre after c; other vN are vias at no path point)
3V3: C1.2 C4.1 C5.1 C6.1 C7.1 C8.1 C14.1 U1.3 U2.1 U2.7 U2.9 U2.24 U2.36 U2.48 U3.3
+5: C10.1 C11.1 C12.1 C13.1 J3.1 J4.2 J4.5 J4.8 J4.11
+12: C2.1 C3.1 D1.1 D2.2 D3.2 D4.2 D5.2 D6.2 D7.2 F1.2 U1.1
CANH: D20.2 J1.2 J1.4 R9.2 U3.7
CANL: D20.1 J1.3 J1.5 R10.1 U3.6
GND: C1.1 C2.2 C3.2 C4.2 C5.2 C6.2 C7.2 C8.2 C9.2 C10.2 C11.2 C12.2 C13.2 C14.2 D1.2 J1.6 J3.2 J4.3 J4.6 J4.9 J4.12 Q1.3 R8.2 U1.2 U1.4 U2.8 U2.23 U2.35 U2.44 U2.47 U2.49 U3.2 U3.8
NetC9_1: C9.1 U2.22
NetC15_1: C15.1 D20.3
NetC15_2: C15.2 R9.1 R10.2 U3.5
NetD2_1: D2.1 D8.2
NetD3_1: D3.1 D9.2
NetD4_1: D4.1 D10.2
NetD5_1: D5.1 D11.2
NetD6_1: D6.1 D12.2
NetD7_1: D7.1 D13.2
NetD8_1: D8.1 D14.2
NetD9_1: D9.1 D15.2
NetD10_1: D10.1 D16.2
NetD11_1: D11.1 D17.2
NetD12_1: D12.1 D18.2
NetD13_1: D13.1 D19.2
NetD14_1: D14.1 R1.1
NetD15_1: D15.1 R2.1
NetD16_1: D16.1 R3.1
NetD17_1: D17.1 R4.1
NetD18_1: D18.1 R5.1
NetD19_1: D19.1 R6.1
NetQ1_1: Q1.1 R7.2 R8.1
NetQ1_4: Q1.4 R1.2 R2.2 R3.2 R4.2 R5.2 R6.2
NetR7_1: R7.1 U2.29
NetU2_32: U2.32 U3.4
NetU2_33: U2.33 U3.1
"Servo 1": J4.1 U2.10
"Servo 2": J4.4 U2.11
"Servo 3": J4.7 U2.12
"Servo 4": J4.10 U2.13
SWCLK: U2.37
SWDIO: U2.34
SWO: U2.39
Vbat: F1.1 J1.1
pads on no net: U2.2 U2.3 U2.4 U2.5 U2.6 U2.14 U2.15 U2.16 U2.17 U2.18 U2.19 U2.20 U2.21 U2.25 U2.26 U2.27 U2.28 U2.30 U2.31 U2.38 U2.40 U2.41 U2.42 U2.43 U2.45 U2.46